# Altium PCB FastCharge1.PcbDoc
Units mm, origin at the board's own origin, x right, y up, seen from the top; angles counter-clockwise.
Board outline 152.4 x 101.6 mm, 2 copper layers (Top Layer, Bottom Layer); 20 components, 11 nets, 55 pads, 2 vias.
Unrouted connection lines stored in the file: 20.
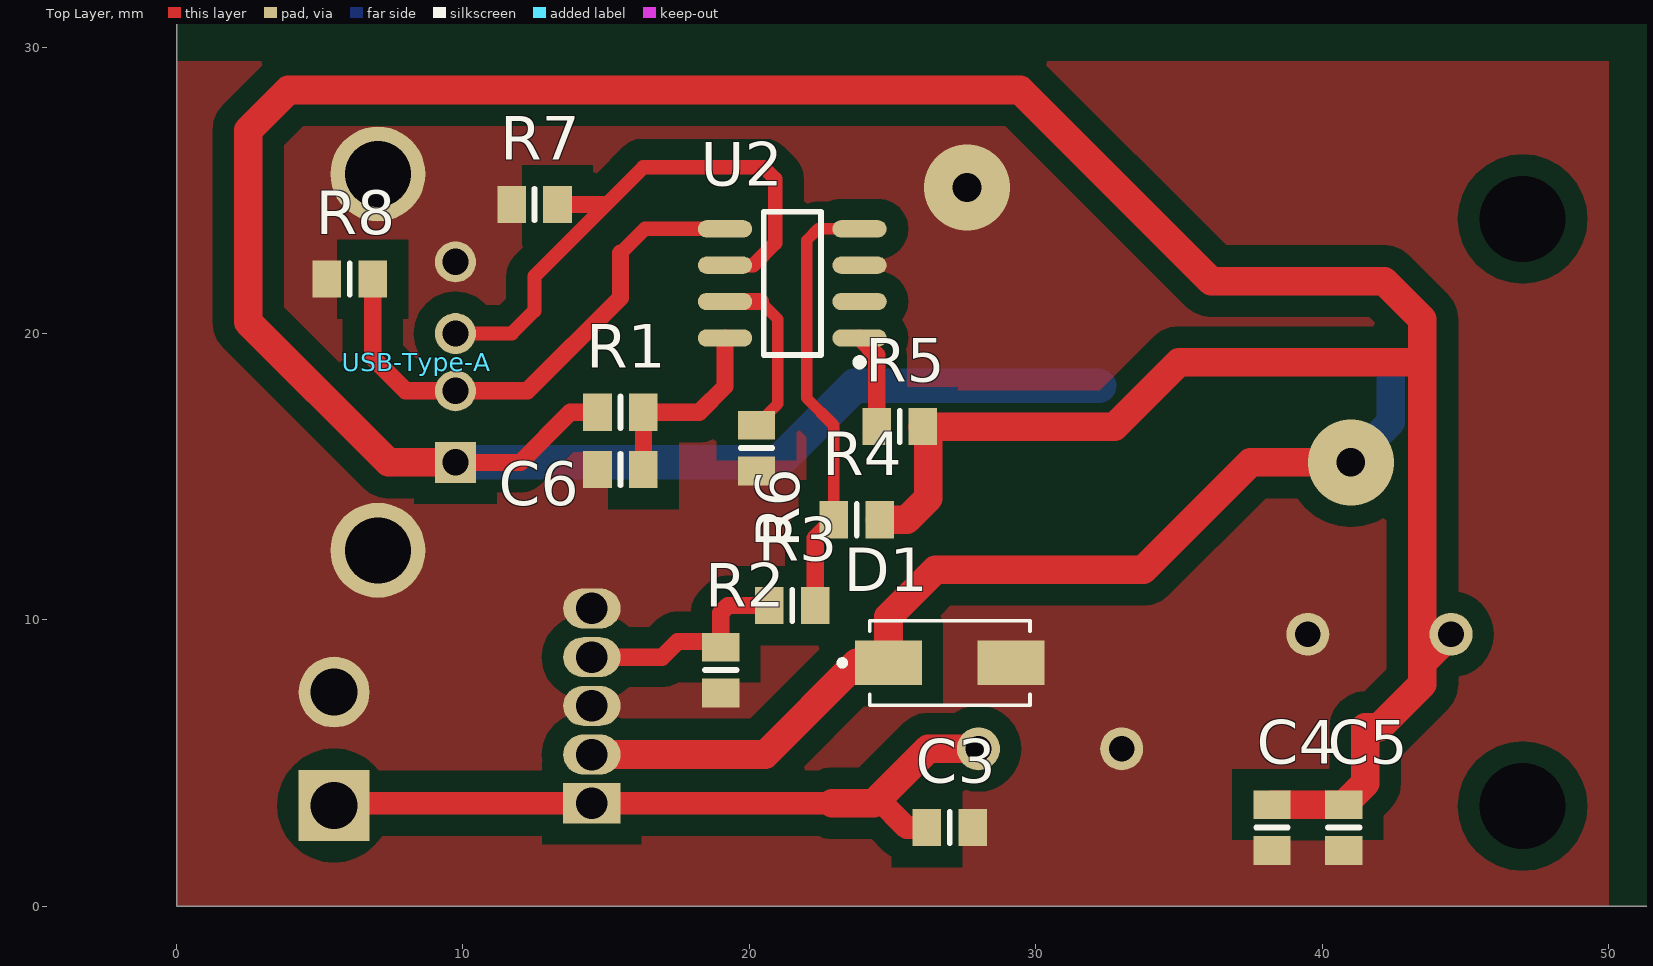
[diagram p0: Top Layer view]
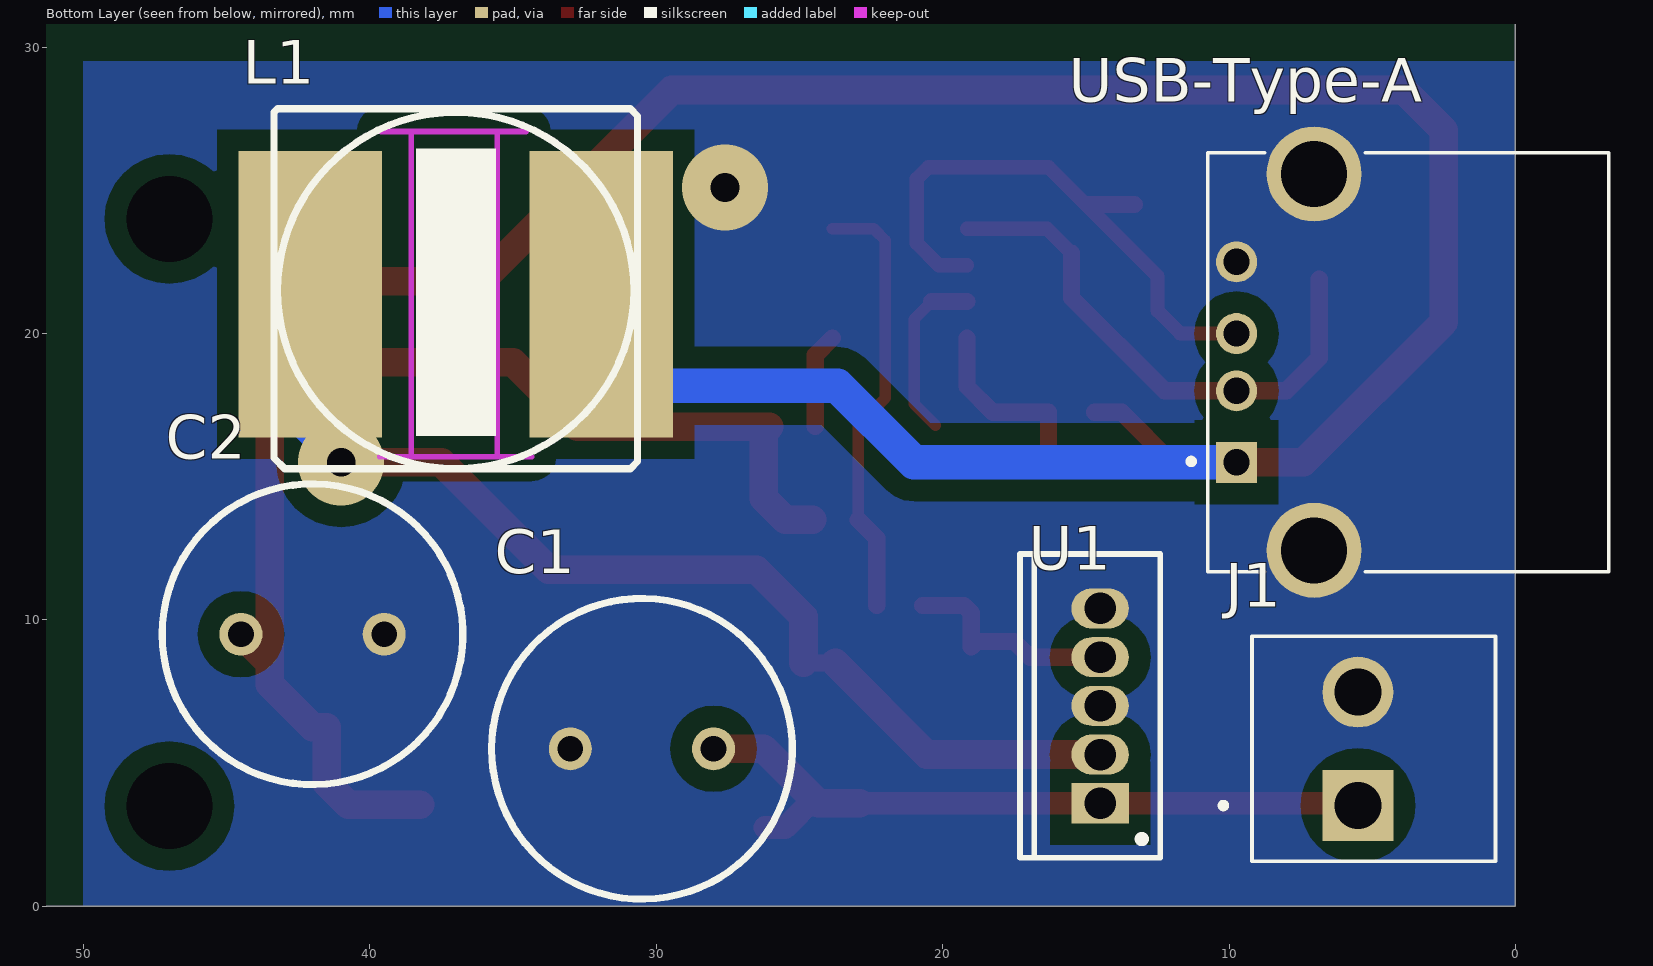
[diagram p1: Bottom Layer view, seen from below]

## Layer stack, top to bottom
Top Solder: solder mask 0.0102, Solder Resist, Dk 3.5
Top Layer: signal copper 0.0356
Dielectric 1: dielectric 0.32, FR-4, Dk 4.8
Bottom Layer: signal copper 0.0356
Bottom Solder: solder mask 0.0102, Solder Resist, Dk 3.5

## Board outline
0,0 152.4,0 152.4,101.6 0,101.6

## Design rules (kind name [scope] priority, off if disabled: settings)
Clearance [All] p1: gap=0.75 ignorepadtopadclearanceinfootprint=FALSE
PolygonConnect [All] p1: connectstyle=Direct reliefconductorwidth=0.254 reliefentries=4 polygonreliefangle="90 Angle" airgapwidth=0.254
RoutingVias [All] p1: holewidth=0.711 width=1.27 viastyle="Through Hole" minholewidth=0.711 minwidth=1.27 maxholewidth=0.711 maxwidth=1.27
SolderMaskExpansion [All] p1: expansion=0.102
Width [All] p1: maxlimit=0.254 minlimit=0.254 preferedwidth=0.254
30 further rules are at their usual default settings.

## Components (designator, comment, footprint, x,y, rotation, side; value= is the part's Value field where it differs from the comment)
C1 "470uF" RB5-10.5 30.5,5.5 r0 bottom
C2 "470uF" RB5-10.5 42,9.5 r180 bottom
C3 "100nF" 6-0805_L 27,2.75 r180 top
C4 "100nF" 6-0805_L 38.25,2.75 r90 top
C5 "100nF" 6-0805_L 40.75,2.75 r90 top
C6 "100nF" 6-0805_L 15.5,15.25 r180 top
D1 "S1M" *DIOM5227X270N_S1M(Primary) 27,8.5 r0 top
J1 "6-1123723-2" *TE_6-1123723-2 5.5,5.5 r90 bottom
L1 "33uH" IND_SMD-13.0mm 37,21.5 r180 bottom
R1 "2k2" 6-0805_L 15.5,17.25 r180 top
R2 "33k" 6-0805_L 19,8.25 r270 top
R3 "1k" 6-0805_L 21.5,10.5 r180 top
R4 "100k" 6-0805_L 23.75,13.5 r180 top
R5 "2k2" 6-0805_L 25.25,16.75 r180 top
R6 "38k4" 6-0805_L 20.25,16 r270 top
R7 "10k" 6-0805_L 12.5,24.5 r0 top
R8 "10k" 6-0805_L 6.05,21.9 r180 top
U1 "LM2596-ADJ" T05A 14.5,7 r90 bottom
U2 "CHY103" "8 pin SOIC_L" 21.5,21.75 r180 top
USB-Type-A "1-292303-1" *TE_1-292303-1_1-292303-1(Primary) 3.75,19 r90 top

## Footprints (in the part's own frame and the unit in brackets; to place one, negate y for a bottom-side part, rotate by r counter-clockwise, add the part's x,y. Pads: shape width x height; smd on the part's side, far side on the other; paste and mask are expansions set on the pad)
6-0805_L [mm] "Chip Resistor, Body 2.0x1.2mm, IPC High Density"
  rect 1x1.3 smd: 1(-0.8,0) 2(0.8,0)
  silkscreen extent 0,-0.55 0,0.55, body extent -1.07,-0.7 1.07,0.7, height 0.7
"8 pin SOIC_L" [mm] "8-Pin Small Outline Integrated Circuit 1.27 mm Pitch, IPC High Density"
  oval 1.9x0.6 smd: 1(-2.35,1.905) 2(-2.35,0.635) 3(-2.35,-0.635) 4(-2.35,-1.905) 5(2.35,-1.905) 6(2.35,-0.635) 7(2.35,0.635) 8(2.35,1.905)
  silkscreen extent -2.48,-2.5 1,2.88, body extent -1.95,-2.45 1.95,2.45, height 1.91
*DIOM5227X270N_S1M(Primary) [mm]
  rect 2.33x1.56 smd: A(2.14,0) C(-2.14,0)
  silkscreen extent -3.85,-1.48 2.8,1.48
*TE_1-292303-1_1-292303-1(Primary) [mm]
  rect 1.428x1.428 hole 0.92: 1(-3.5,-5.99)
  round 1.428 hole 0.92: 2(-1,-5.99) 3(1,-5.99) 4(3.5,-5.99)
  round 3.316 hole 2.3: S1(-6.57,-3.28) S2(6.57,-3.28)
*TE_6-1123723-2 [mm]
  rect 2.475x2.475 hole 1.65: 1(-1.98,0)
  round 2.475 hole 1.65: 2(1.98,0)
  silkscreen extent -3.93,-4.8 3.93,4.8
IND_SMD-13.0mm [mm]
  rect 5x10 smd: 1(-5.08,-0.127) 2(5.08,-0.127)
  Top Layer keep-out lines w0.2: 2.65,-5.8 -2.65,-5.8 ; 2.45,5.55 -2.6,5.55 ; 1.45,-5.75 1.45,5.5 ; -1.55,-5.8 -1.55,5.55
  silkscreen extent -6.35,-6.22 6.35,6.35, body extent -6.2,-6.3 6.3,6.2, height 6.1
RB5-10.5 [mm] "Capacitor (Radial); 2 Leads"
  round 1.5 hole 0.9: 1(-2.5,0) 2(2.5,0)
  silkscreen extent -5.25,-5.25 5.25,5.25
T05A [mm] "TO, Thru-Hole, Vertical, Heatsink Mounted; 5 In-Line Leads; Pitch 1.70 mm"
  rect 1.4x2 hole 1.1: 1(-3.4,0)
  oval 1.4x2 hole 1.1: 2(-1.7,0) 3(0,0) 4(1.7,0) 5(3.4,0)
  silkscreen extent -5.3,-2.1 5.3,2.8, body extent -5.35,-2.15 5.35,2.85, height 15.9

## Part data
C1 C2: library part CAP, ="Cap 7.6mm"
C3 C4 C5 C6: library part "CAP NON", ="Cap non 2.54mm"
D1: "S1 Series 1000 V 1 A 1 uA Surface Mount General Purpose Rectifier - DO-214AC", Package="DO-214AC-214 ON Semiconductor", Availability=Unavailable, MF="ON Semiconductor", MP=S1M, Price=None, SnapEDA_Link=https://www.snapeda.com/parts/S1M/ON%20Semiconductor/view-part/?ref=snap
J1: "3.96 EP HDR ASSY 2P_GREEN_", Package=None, Availability=Unavailable, Centerline_Pitch="3.96 mm[.156 in]", EU_RoHS_Compliance=Compliant, MF="TE Connectivity", MP=6-1123723-2, Number_of_Positions=2, Price=None, Product_Type=Header, SnapEDA_Link=https://www.snapeda.com/parts/6-1123723-2/TE%20Connectivity%20AMP%20Connectors/view-part/?ref=snap, TE_purchase_URL=https://www.te.com/usa-en/product-6-1123723-2.html?te_bu=Cor&te_type=disp&te_campaign=seda_glo_cor-seda-global-disp-prtnr-fy19-seda-model-bom-cta_sma-317_1&elqCampaignId=32493
L1: library part Inductor, "Inductor", ="Inductor 26.8mm"
R1 R2 R3 R4 R5 R6 R7 R8: library part RESISTOR, ="Res 0603"
U1: library part MOSFET-N3, "Two-Gate, N-Channel MOSFET, Externally Terminated Substrate", Code_JEDEC=TS-001-AA, LatestRevisionDate=17-Jul-2002, LatestRevisionNote="Re-released for DXP Platform.", PackageDescription="TO-220, Molded, 5 Lead, Straight", PackageReference=T05A, Published=24-Mar-1999, Publisher="Altium Limited"
USB-Type-A: "Conn USB 2.0 Type A RCP 4 POS Solder RA SMD 4 Terminal 1 Port Box/Tray", Package=None, Availability=Unavailable, EU_RoHS_Compliance=Compliant, MF="TE Connectivity", MP=1-292303-1, Price=None, SnapEDA_Link=https://www.snapeda.com/parts/1-292303-1/TE%20Connectivity%20AMP%20Connectors/view-part/?ref=snap, TE_purchase_URL=https://www.te.com/usa-en/product-1-292303-1.html?te_bu=Cor&te_type=disp&te_campaign=seda_glo_cor-seda-global-disp-prtnr-fy19-seda-model-bom-cta_sma-317_1&elqCampaignId=32493

## Free pads (board coordinates)
  round 1.524 hole 3: 16(47,3.5) 17(47,24)

## Via types
v1: diameter 3, hole 1, Top Layer to Bottom Layer, 2 vias

## Nets (pads, with @x,y where several pads share a name; then routed paths per layer and width w, separated by ;. In a path a pad name is that pad's centre, name@x,y a point inside that pad or via, vN(x,y) a via of type N, cw(c..) or ccw(c..) an arc to the next point about the centre after c; other vN are vias at no path point)
GND: C1.2 C2.2 C3.1 C4.1 C5.1 C6.2 D1.A J1.2 R2.2 R6.2 R7.1 R8.2 U1.3 U1.5 U2.3 USB-Type-A.4 USB-Type-A.S1 USB-Type-A.S2
  other v1: 27.6,25.1
NetC1_1: C1.1 C3.2 J1.1 U1.1
NetC6_1: C6.1 R1.1 U2.8
NetD1_C: D1.C L1.1 U1.2 | length 28.2
  Top Layer w0.6: D1.C@23.75,8.5 D1.C
  Top Layer w1: U1.2 20.55,5.3 D1.C@23.75,8.5 ; D1.C 24.86,10.11 26.5,11.75 33.75,11.75 37.5,15.5
NetR2_1: R2.1 R3.2 U1.4
NetR3_1: R3.1 R4.2 U2.4
NetR5_2: R5.2 U2.1
NetR6_1: R6.1 U2.7
NetR7_2: R7.2 U2.6 USB-Type-A.3 | length 20.3
  Top Layer w0.5: USB-Type-A.3 11.7,20 12.5,20.8 12.5,22 16.3,25.8 20.5,25.8 20.9,25.4 20.9,23.15 20.135,22.385 U2.6
  Top Layer w0.6: R7.2 14.9,24.5
NetR8_1: R8.1 U2.5 USB-Type-A.2 | length 12.7
  Top Layer w0.5: 15.5,22.8 16.355,23.655 U2.5
  Top Layer w0.6: USB-Type-A.2 12.25,18 15.5,21.25 15.5,22.8
VCC: C2.1 C4.2 C5.2 L1.2 R1.2 R4.1 R5.1 USB-Type-A.1
pads on no net: U2.2
copper on no net: | length 213.4
  Top Layer w0.4: 20.25,16.8 21,17.55 21,20.5 20.385,21.115 ; 22.95,13.5 22.95,16.8 22,17.75 22,23.25 22.405,23.655 23.85,23.655
  Top Layer w0.6: 6.85,21.9 6.85,19.15 8,18 9.74,18 ; 9.74,15.5 12,15.5 13.75,17.25 14.7,17.25 ; 14.5,8.7 16.95,8.7 17.5,9.25 18.8,9.25 19,9.05 19,10.25 19.25,10.5 20.7,10.5 ; 16.3,15.25 16.3,17.25 18.25,17.25 19.15,18.15 19.15,19.845 ; 19.15,21.115 20.385,21.115 ; 22.3,10.5 22.3,12.85 22.95,13.5 ; 23.85,19.845 24.45,19.245 24.45,16.75
  Top Layer w0.8: 5.58,3.6 14.5,3.6 22.9,3.6 ; 24.5,3.75 25.5,2.75 25.75,2.75 26.2,2.75
  Top Layer w1: 9.74,15.5 7.4,15.5 2.5,20.4 2.5,26.8 2.5,27.1 3.9,28.5 29.1,28.5 29.457,28.5 36.127,21.83 42.17,21.83 43.5,20.5 43.5,7.75 42,6.25 41.5,6.25 41.5,4.3 40.75,3.55 38.25,3.55 ; 22.9,3.6 24.35,3.6 26.25,5.5 28,5.5 ; 24.55,13.5 25.5,13.5 26.25,14.25 26.25,16.55 26.05,16.75 32.75,16.75 35,19 43.5,19 ; 37.5,15.5 v1(41,15.5) ; 43.5,8.5 44.5,9.5
  Bottom Layer w1: v1(41,15.5) 42.4,16.9 42.4,18.4
  Bottom Layer w1.2: 9.74,15.5 21,15.5 23.673,18.173 32.22,18.173

## Polygon pours and split planes (outlines as drawn)
GND on Top Layer "Top Layer-GND" (solid, remove dead copper, pour order 0): 0,0 50,0 50,29.5 0,29.5
no net on Top Layer "Top Layer-No Net" (solid, remove dead copper, pour order 4): 50.9,-3.2
GND on Bottom Layer "Bottom Layer-GND" (solid, remove dead copper, pour order 2): 0,0 50,0 50,29.5 0,29.5